# Altium PCB PCB1.PcbDoc
Units mil, origin at the board's own origin, x right, y up, seen from the top; angles counter-clockwise.
Board outline 2145 x 1440 mil, 2 copper layers (Top Layer, Bottom Layer); 28 components, 42 nets, 161 pads, 32 vias.
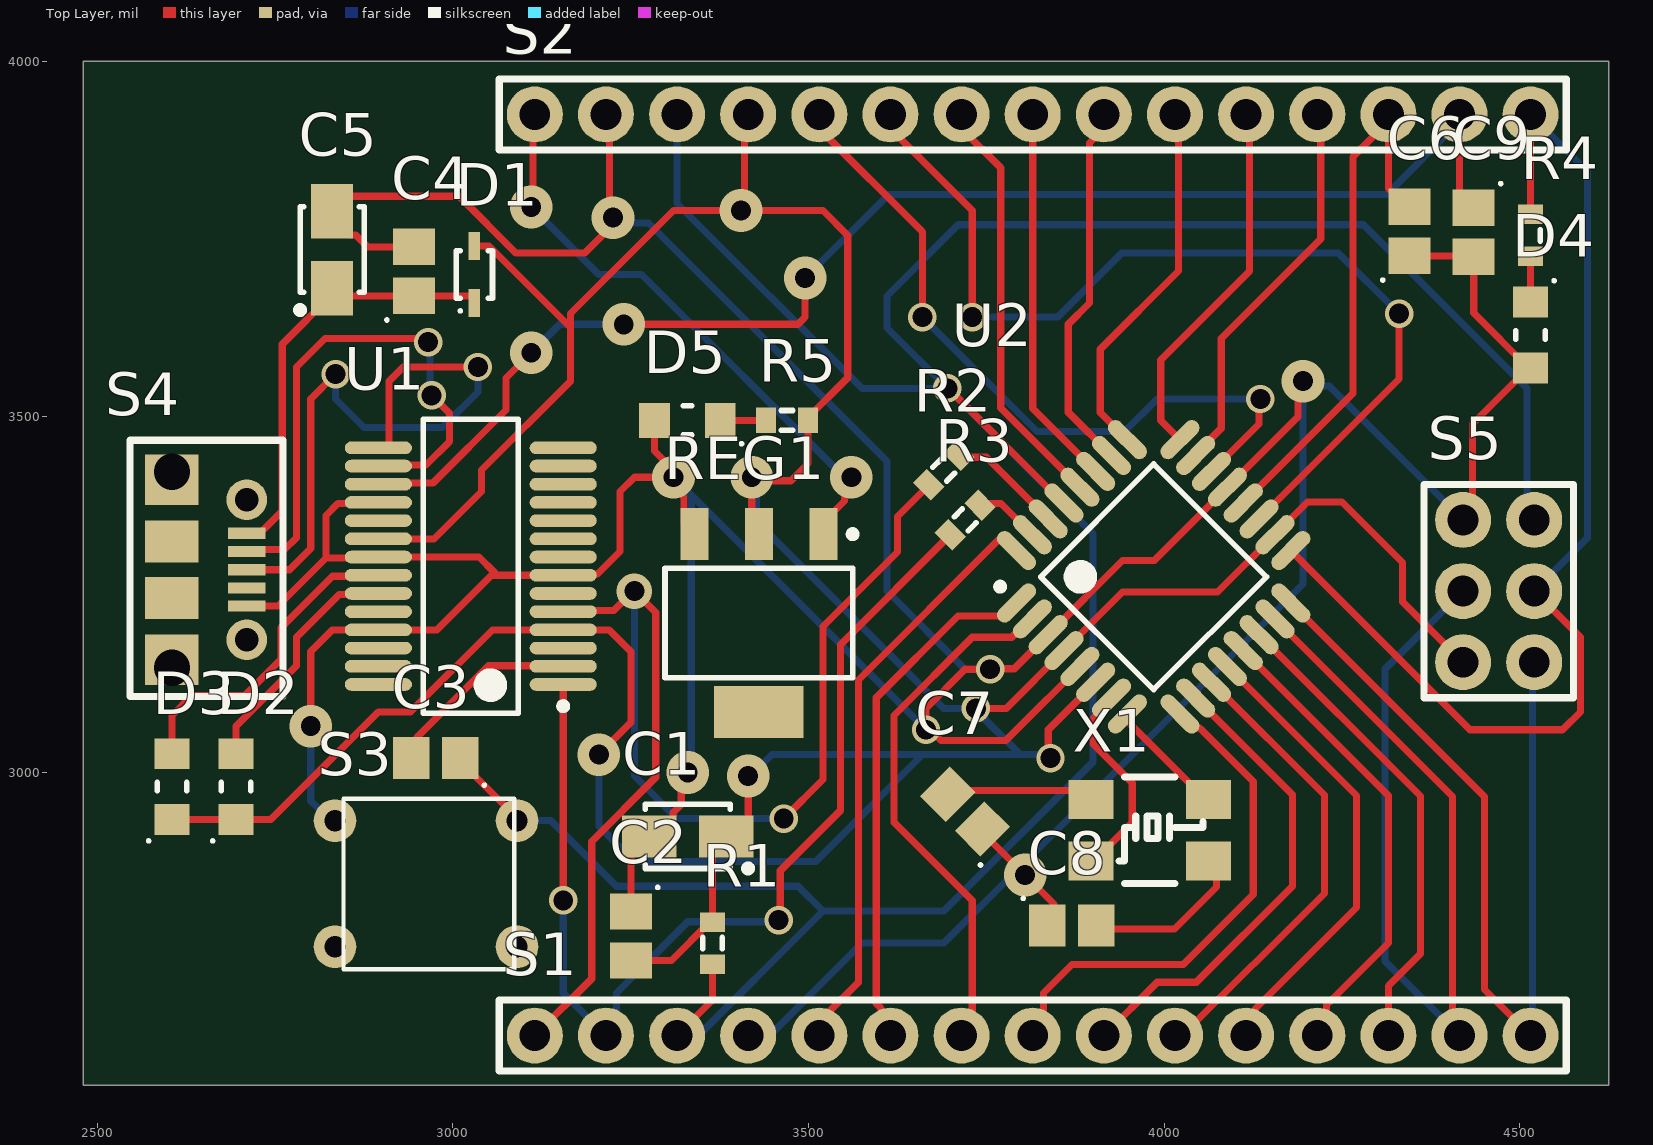
[diagram p0: Top Layer view]
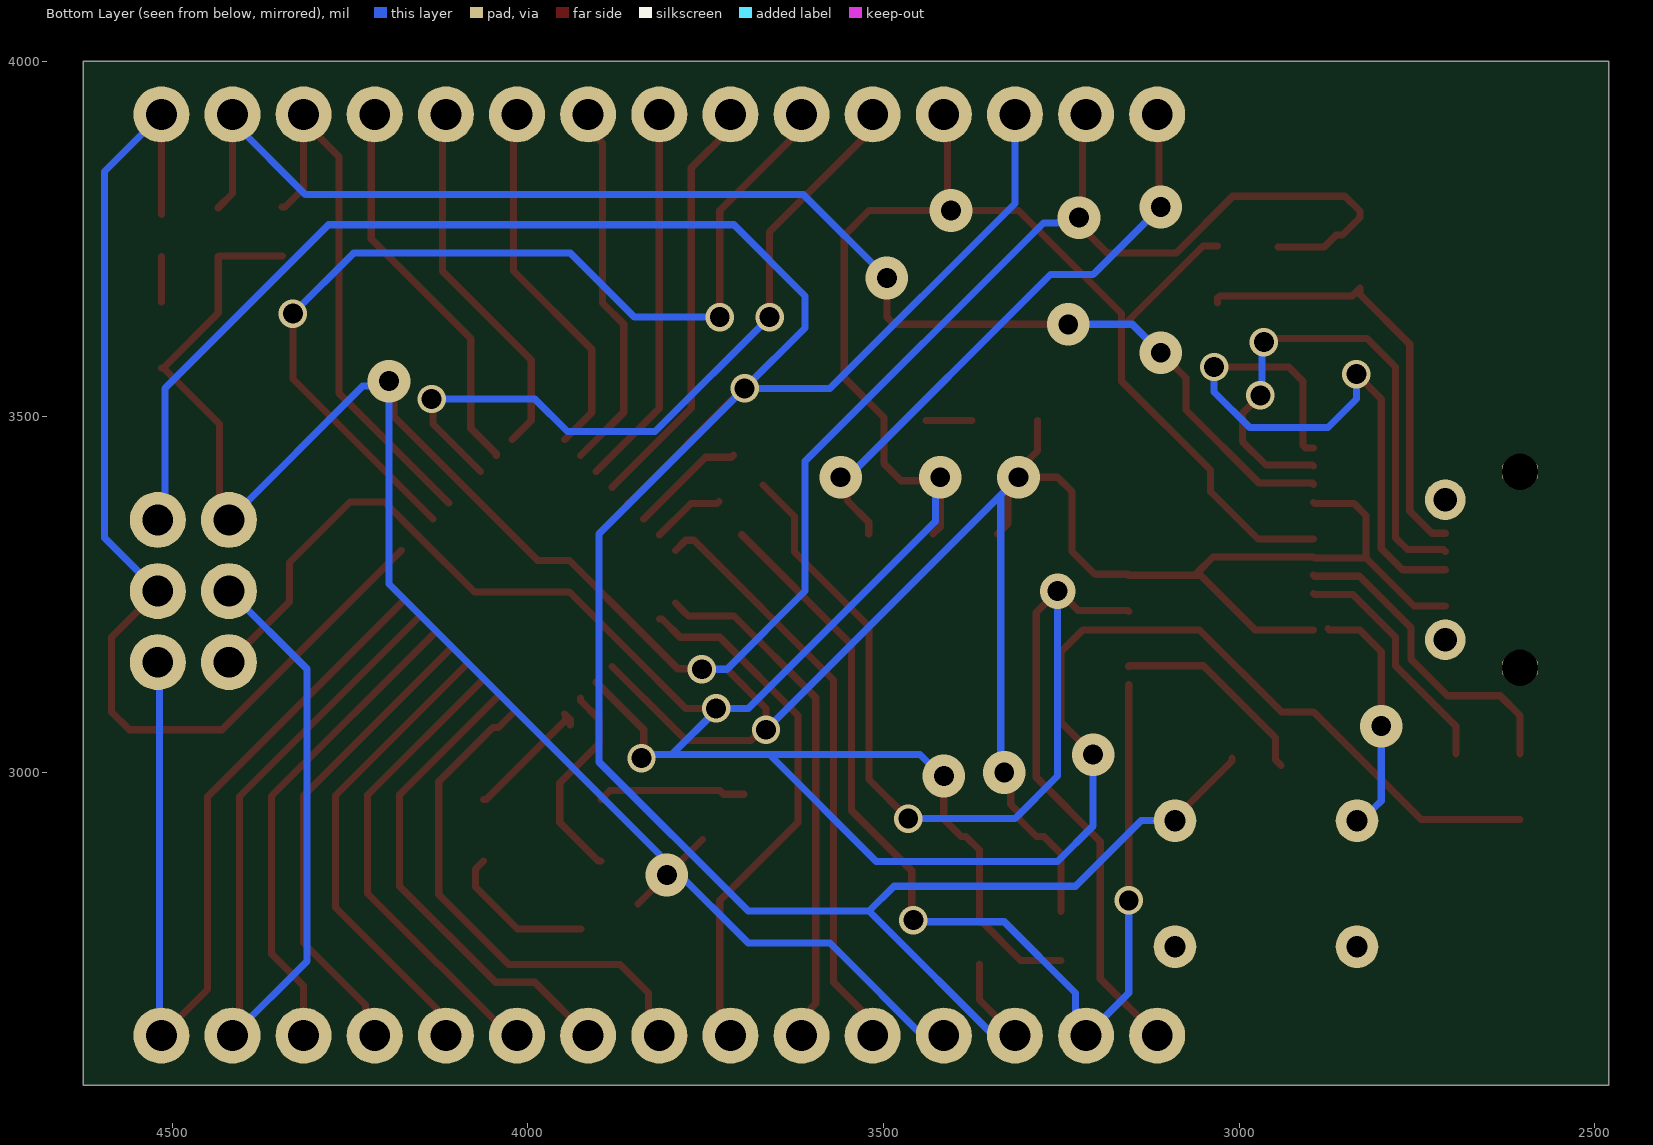
[diagram p1: Bottom Layer view, seen from below]

## Layer stack, top to bottom
Top Solder: solder mask 0.4, Solder Resist, Dk 3.5
Top Layer: signal copper 1.4
Dielectric 1: dielectric 12.6, FR-4, Dk 4.8
Bottom Layer: signal copper 1.4
Bottom Solder: solder mask 0.4, Solder Resist, Dk 3.5

## Board outline
2480,2560 2480,4000 4625,4000 4625,2560

## Design rules (kind name [scope] priority, off if disabled: settings)
Clearance [All] p1: gap=10 ignorepadtopadclearanceinfootprint=FALSE
PolygonConnect [All] p1: connectstyle=Relief reliefconductorwidth=10 reliefentries=4 polygonreliefangle="90 Angle" airgapwidth=10
RoutingVias [All] p1: holewidth=28 width=50 viastyle="Through Hole" minholewidth=28 minwidth=50 maxholewidth=28 maxwidth=50
SolderMaskExpansion [All] p1: expansion=4 istentingtop=FALSE
SupplyNets "Schematic Supply Nets_3" [InNet('+5')] p1: voltage=0.000
SupplyNets "Schematic Supply Nets_2" [InNet('GND')] p2: voltage=0.000
SupplyNets "Schematic Supply Nets_1" [InNet('3.3v')] p3: voltage=0.000
SupplyNets "Schematic Supply Nets" [InNet('VCC')] p4: voltage=0.000
Width [All] p1: maxlimit=10 minlimit=10 preferedwidth=10
30 further rules are at their usual default settings.

## Components (designator, comment, footprint, x,y, rotation, side; value= is the part's Value field where it differs from the comment)
C1 "Capacitor SMT Tantalum" "CASE A - 3216X18" 3330,2910 r180 top value=4.7µF
C2 "100nF Ceramic Multilayer Capacitor_1" CAPCP2012X09N 3250,2770 r270 top
C3 "100nF Ceramic Multilayer Capacitor_1" CAPCP2012X09N 2975.55,3020 r180 top
C4 "100nF Ceramic Multilayer Capacitor_1" CAPCP2012X09N 2945,3704.45 r90 top
C5 "Capacitor SMT Tantalum" "CASE A - 3216X18" 2830,3735 r90 top value=4.7µF
C6 "100nF Ceramic Multilayer Capacitor_1" CAPCP2012X09N 4345,3760.55 r90 top
C7 "C0805C180J5GACTU" CAPCP2012X09N 3720,2945 r135 top
C8 "C0805C180J5GACTU" CAPCP2012X09N 3870,2785 r0 top
C9 "100nF Ceramic Multilayer Capacitor_1" CAPCP2012X09N 4435,3759.45 r270 top
D1 "Schottky diode" DIOM1712X07N 3030,3700 r90 top
D2 "Red" LED1913X12NRED 2695,2980 r90 top
D3 "green" LED1913X12NGREEN 2605,2980 r90 top
D4 "blue" LED1913X12NBLUE 4515,3615 r270 top
D5 "blue" LED1913X12NBLUE 3329.53,3495 r180 top
R1 "Res3" J1-0603 3365,2760 r270 top value=1K
R2 "Res3" J1-0603 3690,3425 r225 top value=1K
R3 "Res3" J1-0603 3720,3355 r225 top value=1K
R4 "Res3" J1-0603 4515,3755 r90 top value=1K
R5 "Res3" J1-0603 3469.53,3495 r0 top value=1K
REG1 "Reg" SOT230P700X180-4N 3430,3210 r270 top
S1 "Left" Header 3115,2630 r0 top
S2 "Right" Header 3115,3925 r0 top
S3 "Switch" "Tactile Switch" 2834.09,2932.17 r180 top
S4 "Type B USB Connector" MicroUSB 2710,3333.43 r270 top
S5 "ICSP" "ISP HEADER" 3965,2460 r90 top
U1 "FT232RL, UART 3MBd, 28-Pin, SSOP" SOP65P780X200-28N 3025,3290 r180 top
U2 "ATMEGA328P-AU" TQFP80P900X900X120-32N 3985,3275 r45 top
X1 "Aker 16MHz Crystal SMT" "Aker S5C Crystal" 3896.89,2875.51 r180 top value=16MHz

## Footprints (in the part's own frame and the unit in brackets; to place one, negate y for a bottom-side part, rotate by r counter-clockwise, add the part's x,y. Pads: shape width x height; smd on the part's side, far side on the other; paste and mask are expansions set on the pad)
"Aker S5C Crystal" [mm]
  rect 1.6x1.4 smd: 1(0,0) 2(-4.2,0) 3(0,-2.2) 4(-4.2,-2.2)
  round 0.254 on Top Overlay: 5(-3,-2.4)
  silkscreen extent -4,-3 -1,0.8, body extent -4.7,-2.8 0.5,0.6, height 1
CAPCP2012X09N [mm] "Chip Capacitor, 2-Leads, Body 2.00x1.25mm, IPC Medium Density"
  rect 1.3x1.5 smd: 1(-0.875,0) 2(0.875,0)
  silkscreen extent -1.79,0.91 -1.69,1.01, body extent -1.05,-0.57 0.95,0.68, height 0.78
"CASE A - 3216X18" [mm] "Molded Capacitor, 2-Leads, Body 3.2x1.6mm, IPC Medium Density"
  rect 1.95x1.5 smd: 1(-1.375,0) 2(1.375,0)
  silkscreen extent -2.28,-1.14 1.52,1.27, body extent -1.52,-0.76 1.65,0.84, height 1.77
DIOM1712X07N [mm] "Molded Diode, 2-Leads, Body 1.70x1.25mm, IPC Medium Density"
  rect 1x0.4 smd: 1(-1.016,0) 2(1.016,0)
  silkscreen extent -1.35,-0.65 0.85,0.65, body extent -0.9,-0.45 0.9,0.45, height 0.8
Header [mm] "SIL Header"
  round 2 hole 1.1: 1(0,0) 2(2.54,0) 3(5.08,0) 4(7.62,0) 5(10.16,0) 6(12.7,0) 7(15.24,0) 8(17.78,0) 9(20.32,0) 10(22.86,0) 11(25.4,0) 12(27.94,0) 13(30.48,0) 14(33.02,0) 15(35.56,0)
  silkscreen extent -1.27,-1.27 36.83,1.27, body extent -1.33,-1.35 36.93,1.35, height 8.6
"ISP HEADER" [mm] "SIL Header for programming"
  round 2 hole 1.1: 1(17.653,-14.097) 2(17.653,-11.557) 3(20.193,-14.097) 4(20.193,-11.557) 5(22.733,-14.097) 6(22.733,-11.557)
  silkscreen extent 16.38,-15.49 24,-10.16, body extent 16.38,-15.37 24,-10.29, height 8
J1-0603 [mm] "Chip Resistor, Body 1.6x0.8mm, IPC High Density"
  rect 0.7x0.9 smd: 1(-0.75,0) 2(0.75,0)
  silkscreen extent -0.2,-0.35 0.2,0.35, body extent -0.85,-0.48 0.85,0.48, height 0.9
LED1913X12NBLUE [mm] "LED 2-Leads, Body 1.90x1.32mm, IPC Medium Density"
  rect 1.1x1.25 smd: 1(-1.175,0) 2(1.175,0)
  silkscreen extent -1.99,-0.53 0.15,0.89, body extent -1,-0.62 1.02,0.62, height 1.1
LED1913X12NGREEN [mm] "LED 2-Leads, Body 1.90x1.32mm, IPC Medium Density"
  rect 1.1x1.25 smd: 1(-1.175,0) 2(1.175,0)
  silkscreen extent -1.99,-0.53 0.15,0.89, body extent -1.01,-0.62 1.01,0.63, height 1.1
LED1913X12NRED [mm] "LED 2-Leads, Body 1.90x1.32mm, IPC Medium Density"
  rect 1.1x1.25 smd: 1(-1.175,0) 2(1.175,0)
  silkscreen extent -1.99,-0.53 0.15,0.89, body extent -1.02,-0.43 1.04,0.47, height 0.85
MicroUSB [mm] "MicroUSB  Molex 5Pin"
  rect 0.4x1.35 smd: 1(-0.07,0) 2(0.58,0) 3(1.23,0) 4(1.88,0) 5(2.53,0)
  rrect50% 0.6x1.3 hole 1.3: ""(-2.27,-2.667) ""(-2.27,-2.667) ""(4.73,-2.667)
  rect 1.8x1.9 smd: ""(-1.98,-2.678) ""(4.45,-2.678)
  round 1.45 hole 0.85: ""(-1.27,0) ""(3.73,0)
  rect 1.5x1.9 smd: ""(0.218,-2.678) ""(2.242,-2.678)
  silkscreen extent -3.39,-4.17 5.75,1.3, body extent -2.83,-5.32 5.37,0.11, height 2.68
SOP65P780X200-28N [mm] "SOP, 28-Leads, Body 10.20x5.30mm, Pitch 0.65mm, IPC Medium Density"
  oval 2.4x0.45 smd: 1(-3.3,4.225) 2(-3.3,3.575) 3(-3.3,2.925) 4(-3.3,2.275) 5(-3.3,1.625) 6(-3.3,0.975) 7(-3.3,0.325) 8(-3.3,-0.325) 9(-3.3,-0.975) 10(-3.3,-1.625) 11(-3.3,-2.275) 12(-3.3,-2.925) 13(-3.3,-3.575) 14(-3.3,-4.225) 15(3.3,-4.225) 16(3.3,-3.575) 17(3.3,-2.925) 18(3.3,-2.275) 19(3.3,-1.625) 20(3.3,-0.975) 21(3.3,-0.325) 22(3.3,0.325) 23(3.3,0.975) 24(3.3,1.625) 25(3.3,2.275) 26(3.3,2.925) 27(3.3,3.575) 28(3.3,4.225)
  silkscreen extent -3.43,-5.25 1.7,5.25, body extent -3.91,-5.1 3.91,5.1, height 2
SOT230P700X180-4N [mm] "SOT223, 4-Leads, Body 6.50x7.00mm (avg), Pitch 2.30mm, IPC Medium Density"
  rect 1.85x1 smd: 1(-3.175,2.3) 2(-3.175,0) 3(-3.175,-2.3)
  rect 1.85x3.2 smd: 4(3.175,0)
  silkscreen extent -3.3,-3.35 1.95,3.48, body extent -3.8,-3.12 3.29,3.38, height 1.65
"Tactile Switch" [mil]
  round 60 hole 30: 1(0,0) 2(-255.91,0) 3(0,177.17) 4(-255.91,177.17)
  silkscreen extent -252,-31 -12,209, body extent -277,-29 27,209, height 197
TQFP80P900X900X120-32N [mm] "TQFP, 32-Leads, Body 7.00x7.00mm, Pitch 0.80mm, IPC Medium Density"
  oval 1.75x0.55 smd: 1(-4.125,2.8) 2(-4.125,2) 3(-4.125,1.2) 4(-4.125,0.4) 5(-4.125,-0.4) 6(-4.125,-1.2) 7(-4.125,-2) 8(-4.125,-2.8) 17(4.125,-2.8) 18(4.125,-2) 19(4.125,-1.2) 20(4.125,-0.4) 21(4.125,0.4) 22(4.125,1.2) 23(4.125,2) 24(4.125,2.8)
  oval 0.55x1.75 smd: 9(-2.8,-4.125) 10(-2,-4.125) 11(-1.2,-4.125) 12(-0.4,-4.125) 13(0.4,-4.125) 14(1.2,-4.125) 15(2,-4.125) 16(2.8,-4.125) 25(2.8,4.125) 26(2,4.125) 27(1.2,4.125) 28(0.4,4.125) 29(-0.4,4.125) 30(-1.2,4.125) 31(-2,4.125) 32(-2.8,4.125)
  silkscreen extent -4.25,-2.85 2.85,3.75, body extent -4.44,-4.5 4.56,4.5, height 1.6

## Part data
C1 C5: library part "4.7µF Tant RS 496-3545", "Capacitor,tantalum,SMT,16V,4.7uF,10%,A-case", Package=3216-18, Tolerance=10%, Voltage=16V, ComponentLink1Description="Supplier Website", ComponentLink1URL=http://za.rs-online.com/web/search/searchBrowseAction.html?method=getProduct&R=4963545, ComponentLink2Description="RS Data sheet", ComponentLink2URL=http://docs-europe.origin.electrocomponents.com/webdocs/04ed/0900766b804ed4cc.pdf, LatestRevisionDate=28-April-2010, Part Originator="H Theron", Publisher=DPSS, RS Stock Nr.=496-3545
C2 C3 C4 C6 C9: "AVX 0805 Standard 100nF Ceramic Multilayer Capacitor, 50 V dc X7R Dielectric ±10% SMD", Capacitance=100nF, Manufacturer=AVX, Package=0805, Voltage=50V, Creator="Ritesh Kanjee", Datasheet URL=http://za.rs-online.com/web/p/ceramic-multilayer-capacitors/4646688/, Date Created="18 February 2015", RS Stock No.=464-6688
C7 C8: library part "18pF Ceramic Multilayer Capacitor, 50 V dc C0G Dielectric ±5% SMD", "18pF Ceramic Multilayer Capacitor, 50 V dc C0G Dielectric ±5% SMD", Capacitance=18pF, Manufacturer=Kemet, Package=0805, Voltage=50V, Creator="Ritesh Kanjee", Datasheet URL=http://za.rs-online.com/web/p/ceramic-multilayer-capacitors/6480935/?searchTerm=C0805C180J5GACTU&relevancy-data=636F3D3226696E3D4931384E4B6E6F776E41734D504E266C753D656E266D6D3D6D61746368616C6C7061727469616C26706D3D5E5B5C707B4C7D5C707B4E647D2D2C2F255C2E5D2B2426706F3D313326736E3D592673743D4D414E5F504152545F4E554D4245522677633D424F5448267573743D4330383035433138304A35474143545526, Date Created="18 February 2015", RS Stock No.=648-0935
D1: library part "Schottky Diode, 0.5A, 20V, 2.4ns, 2-Pin SMini2 F5 B", "Panasonic DB2J20900L Schottky Diode, 0.5A, 20V, 2.4ns, 2-Pin SMini2 F5 B", Manufacturer=Panasonic, Manufacturer Part No.=DB2J20900L, Maximum Continuous Forward Current=0.5A, Peak Reverse Repetitive Voltage=20V, Created By="R Kanjee", Datasheet=http://docs-europe.electrocomponents.com/webdocs/1398/0900766b813986b3.pdf, Date Created="1 March 2015", RS Stock No.=713-2703
D2: library part "Kingbright Red LED, 100 mcd 120 ° 0805", "Kingbright Red LED, 100 mcd 120 ° 0805", Color=RED, Forward Voltage=1.85V, Manufacturer=KingBright, Manufacturer Part No.=KP-2012SRC-PRV, Creator="Ritesh Kanjee", Datasheet URL=http://za.rs-online.com/web/p/visible-leds/4663813/, Date Created="18 February 2015", RS Stock No.=466-3813
D3: library part "Kingbright Green LED, 70 mcd 120 ° 0805", "Kingbright Green LED, 70 mcd 120 ° 0805", Color=Green, Forward Voltage="2.1 V", Manufacturer=KingBright, Manufacturer Part No.=KP-2012MGC, Creator="Ritesh Kanjee", Datasheet URL=http://za.rs-online.com/web/p/visible-leds/4663778/, Date Created="18 February 2015", RS Stock No.=466-3778
D4 D5: library part "Kingbright Blue LED, 60 mcd 120 ° 0805", "Kingbright Blue LED, 60 mcd 120 ° 0805", Color=Blue, Forward Voltage=3.2V, Manufacturer=KingBright, Manufacturer Part No.=KP-2012PBC-A, Creator="Ritesh Kanjee", Datasheet URL=http://za.rs-online.com/web/p/visible-leds/4663784/, Date Created="18 February 2015", RS Stock No.=466-3784
R1 R2 R3 R4 R5: "Resistor", LatestRevisionDate=29-May-2009, LatestRevisionNote="IPC-7351 Footprint Added.", PackageDescription="Chip Resistor", PackageReference=J1-0603, Published=8-Jun-2000, Publisher="Altium Limited"
REG1: library part LM1117MP-5.0, "LM1117MP-5.0/NOPB, Low Dropout Voltage Regulator, 1.5A, 5 V ±1%, 4-Pin SOT-223", Manufacturer="Texas Instruments", Maximum Input Voltage=15V, Output Voltage=5V, Supply Current=1.5Amps, Created By="R Kanjee", Datasheet URL=http://za.rs-online.com/web/p/low-dropout-voltage-regulators/5339583/, Date Created="26 February 2015", RS Stock No.=533-9583
S1 S2: library part "Single row; PCB headers", "connector;str header;single row;.1 cont centers;.095 tail;gold or gtx;36 contact", Current Rating="3Amps Continuous", Manufacturer=FCI, Manufacturer Part No.=68000-236HLF, Created By="R Kanjee", Date Created="1 March 2015", RS Stock No.=2509565626
S3: library part "Tactile Switch SPST- NO 0.05A @24V", "Tactile Switch SPST- NO 0.05A @24V", Manufacturer=Omron, Manufacturer Part No.=B3F1000, Creator="R Kanjee", Date Created="25 February 2015", RS Stock No.=686-6847, State="Normaly Open"
S4: library part "Micro USB Connector, 30 V ac, 1.8A", "NewMolex Right Angle SMT Female Type B Micro USB Connector, 30 V ac, 1.8A", Manufacturer=Molex, Manufacturer Part No.=105017-0001, Max Current=1.8A, Max Voltage=30V, Creator="R Kanjee", Datasheet URL=http://za.rs-online.com/web/p/micro-usb-connectors/8486764/, Date Created="28 February 2015", RS Stock No=848-6764
S5: library part "Programming ISP, Programming Headers Dual Row", "Programming Headers Dual Row", Current Rating="3Amps Continuous", Manufacturer=FCI, Manufacturer Part No.=68000-236HLF, Created By="R Kanjee", Date Created="1 March 2015", RS Stock No.=2509565626
U1: library part "FT232RL USB to UART, Universal Asynchronous Receiver & Transmitter 3MBd, 28-Pin, SSOP", "FT232RL, Universal Asynchronous Receiver & Transmitter 3MBd, 28-Pin, SSOP", Manufacturer="FTDI Chip", Manufacturer Part No.=FT232RL, Creator="R Kanjee", Date Created="03 March 2015", Pin Count=28, RS Stock No.=406-580
U2: "ATMEGA328P-AU, 8 bit AVR Microcontroller 20MHz 1 kB, 32 kB Flash, 2 kB RAM, I2C 32-Pin TQFP", Company="Lumina Inova", Created By="Ritesh Kanjee", Datasheet URL=http://docs-europe.electrocomponents.com/webdocs/0db4/0900766b80db4deb.pdf, Date Created="14 February 2015", RS Stock No.=696-3092
X1: library part "Aker  C5S-16.000-12-3030-X", "Aker S5C SMT Crystal", Frequency Stability=+/-30ppm, Load Capacitance=12pF, Manufacturer=Aker, Manufacturer Part #=C5S-16.000-12-3030-X, Package="3.2x5mm SMD", Creator="R Kanjee", HelpURL=http://za.rs-online.com/web/p/crystal-units/6719488/, RS="RS 671-9488", RS Stock Nr.=671-9488, Supplier=RS

## Via types
v1: diameter 40, hole 28, Top Layer to Bottom Layer, 16 vias
v2: diameter 60, hole 28, Top Layer to Bottom Layer, 15 vias
v3: diameter 50, hole 28, Top Layer to Bottom Layer, 1 vias

## Nets (pads, with @x,y where several pads share a name; then routed paths per layer and width w, separated by ;. In a path a pad name is that pad's centre, name@x,y a point inside that pad or via, vN(x,y) a via of type N, cw(c..) or ccw(c..) an arc to the next point about the centre after c; other vN are vias at no path point)
3.3v: C9.1 S2.14 U1.17 | length 1929.1
  Top Layer w10: U1.17 2896.56,3406.63 2971.63,3406.63 3074.49,3509.49 3074.49,3554.49 v2(3110,3590) ; v2(3240,3630) 3485,3630 3495,3640 v2(3495,3695) ; S2.14 4415,3813.9 C9.1
  Bottom Layer w10: v2(3110,3590) 3150,3630 v2(3240,3630) ; v2(3495,3695) 3612.21,3812.21 4312.21,3812.21 S2.14@4415,3915
+5: C1.1 C2.2 D1.2 D2.1 D3.1 R1.1 R5.2 REG1.2 S2.4 S5.2 U1.4 U1.20 U2.4 U2.6 U2.18 | length 5795.1
  Top Layer w10: D3.1 D2.1 2743.74,2933.74 2895,3085 2940,3085 3055.43,3200.43 U1.4 3219.57,3200.43 3250,3170 3250,3070 v2(3205,3025) ; U1.20 2973.39,3328.39 3040,3395 3040,3425 3165,3550 3165,3625.49 ; D1.2 3050.49,3740 3165,3625.49 ; C2.2 3307.09,2735.55 3361.06,2789.53 R1.1 3365,2890.87 C1.1 3390.47,2910 3415,2934.53 v2(3415,2995) ; S2.4 3410,3920 3410,3795 v2(3405,3790) ; REG1.2 3420,3345 v2(3420,3415) 3425,3410 3475,3410 3499.06,3434.06 R5.2 3499.06,3498.94 3555,3554.88 3555,3755 3520,3790 v2(3405,3790) ; v1(3735,3090) 3777.73,3090 U2.4 3941.25,3253.52 4074.87,3253.52 U2.18 4201.36,3380 4250,3380 4335,3295 4335,3240 S5.2 ; v1(3840,3020) 3836.81,3023.19 3836.81,3060 U2.6 ; 3165,3625.49 3165,3645 3310,3790 v2(3405,3790)
  Bottom Layer w10: v2(3205,3025) 3205,2925 3255,2875 3510,2875 3660,3025 ; v2(3415,2995) 3418.64,2995 3448.64,3025 3660,3025 ; v2(3420,3415) 3426.82,3408.18 3426.82,3353.18 3690,3090 v1(3735,3090) 3735,3087.5 3797.5,3025 ; v1(3840,3020) 3835,3025 3797.5,3025 ; 3660,3025 3797.5,3025
A0: S2.12 U2.23 | length 552.3
  Top Layer w10: U2.23 4044.16,3448.06 4080,3483.9 4080,3610 4220,3750 S2.12@4220,3925
A1: S2.11 U2.24 | length 520.1
  Top Layer w10: U2.24 3995,3494.67 3995,3580 4120,3705 S2.11@4120,3925
A2: S2.10 U2.25 | length 518.6
  Top Layer w10: U2.25 3910,3505.9 3910,3595 4020,3705 S2.10@4020,3925
A3: S2.9 U2.26 | length 527.5
  Top Layer w10: S2.9@3920,3925 3920,3909.77 3895,3884.77 3895,3660 3865,3630 3865,3506.36 U2.26
A4: S2.8 U2.27 | length 521
  Top Layer w10: S2.8@3815,3907.53 3815,3511.81 U2.27
A5: S2.7 U2.28 | length 572.9
  Top Layer w10: S2.7@3715,3905 3770,3850 3770,3512.27 U2.28
A6: S2.6 U2.19 | length 1355.2
  Top Layer w10: S2.6@3615,3905 3730,3790 v1(3730,3640) ; U2.19 4330,3553.19 v1(4330,3645)
  Bottom Layer w10: v1(3730,3640) 3850,3640 3940,3730 4245,3730 v1(4330,3645)
A7: S2.5 U2.22 | length 1015.8
  Top Layer w10: S2.5@3515,3905 3660,3760 v1(3660,3640) ; U2.22 4133.19,3490 4133.19,3523.19 v1(4135,3525)
  Bottom Layer w10: v1(3660,3640) 3820.8,3479.2 3944.2,3479.2 3990,3525 v1(4135,3525)
AREF: C6.2 S2.13 U2.20 | length 776.2
  Top Layer w10: U2.20 4265,3532.73 4265,3865 S2.13@4322.5,3922.5 ; S2.13 4315,3821.06 4341.06,3795 C6.2
D2: S1.5 U2.32 | length 841.1
  Top Layer w10: S1.5@3530,2615 3530,2665 3570,2705 3570,3130 3766.36,3326.36 3777.74,3326.36 U2.32
D3: S1.6 U2.1 | length 735.6
  Top Layer w10: S1.6 3601.85,2643.15 3601.85,2668.38 3595,2675.23 3595,3105 3710,3220 3774.1,3220 3780.54,3226.44 U2.1
D4: S1.7 U2.2 | length 761.3
  Top Layer w10: S1.7@3730,2615 3730,2820 3620,2930 3620,3080 3730,3190 3785.49,3190 3811.33,3215.84 U2.2
D5: S1.8 U2.9 | length 719.9
  Top Layer w10: S1.8 3830,2645 3830,2690 3870,2730 4026.72,2730 4125,2828.28 4125,2987.24 4050.92,3061.32 4048.95,3063.28 4040.82,3063.28 U2.9
D6: S1.9 U2.10 | length 672.7
  Top Layer w10: S1.9 3990,2705 4045,2705 4180,2840 4180,2968.64 U2.10
D7: S1.10 U2.11 | length 655.3
  Top Layer w10: S1.10 4025,2630 4225,2830 4225,2968.19 U2.11
D8: S1.11 U2.12 | length 658.3
  Top Layer w10: U2.12 4270,2967.73 4270,2810 4128.15,2668.15 4128.15,2643.15 S1.11
D9: S1.12 U2.13 | length 667.2
  Top Layer w10: U2.13 4315,2967.27 4315,2760 4228.15,2673.15 4228.15,2643.15 S1.12
D10: S1.13 U2.14 | length 676.1
  Top Layer w10: U2.14 4360,2966.81 4360,2745 4315,2700 S1.13
D11: S1.14 S5.4 U2.15 | length 1393.2
  Top Layer w10: U2.15 4405,2966.36 S1.14@4405,2640
  Bottom Layer w10: S1.14 4310,2735 4310,3145 S5.4
D12: S1.15 S5.1 U2.16 | length 1296.1
  Top Layer w10: U2.16 4450,2965.9 4450,2695 S1.15@4530,2615
  Bottom Layer w10: S1.15 4517.5,2632.5 4517.5,3152.5 S5.1
D13: R4.2 S2.15 S5.3 U2.17 | length 1593.5
  Top Layer w10: U2.17 4429.67,3060 4560,3060 4585,3085 4585,3190 S5.3 ; R4.2 S2.15
  Bottom Layer w10: S2.15 4595,3845 4595,3330 S5.3
GND: C1.2 C2.1 C4.2 C5.2 C6.1 C7.1 C8.1 C9.2 D4.2 D5.2 REG1.3 S1.4 S2.2 S3.1 S4.5 S5.6 U1.7 U1.18 U1.21 U1.25 U2.3 U2.5 U2.21 | length 7704.1
  Top Layer w10: S4.5 2753.82,3233.82 2821.32,3301.32 ; v2(2800,3065) 2800,3170 2830,3200 2872.83,3200 U1.25@2875,3202.17 ; C5.2@2830,3788.45 2830,3780.28 2854.53,3755.75 2863.39,3755.75 2880.24,3738.9 C4.2 ; C5.2 2850.87,3810 3008.77,3810 3088.77,3730 3185,3730 3225,3770 v2(3225,3780) 3220,3785 3220,3920 S2.2 ; U1.25 2977.15,3200.43 3053.92,3277.2 ; U1.18 2893.6,3378.09 2838.09,3378.09 2821.32,3361.32 2821.32,3301.32 ; C2.1 3250,2885.47 3274.53,2910 C1.2 3284.72,2910 3309.25,2934.53 3309.25,2943.39 3320.87,2955 3320.87,2990.87 v2(3330,3000) ; D5.2 3283.27,3451.91 3310,3425.17 v2(3310,3415) ; REG1.3 3324.76,3349.69 3324.76,3386.71 3310,3401.47 v2(3310,3415) ; C7.1@3754.36,2905.64 v2(3804.32,2855.68) 3845,2815 ; U2.5 3792.27,3060 3777.39,3045.12 3749.32,3045.12 3749.2,3045 3685.86,3045 3670.86,3060 v1(3665,3060) 3665,3090 3720,3145 v1(3755,3145) 3755.81,3145.81 3789,3145.81 U2.3 3941.25,3298.06 3985.79,3298.06 U2.21 4187.73,3500 4187.73,3542.73 v2(4195,3550) ; C6.1 4433.9,3726.1 C9.2 4435,3645.79 D4.2@4512.05,3568.74 ; S5.6 4433.15,3368.15 4433.15,3489.85 D4.2@4512.05,3568.74 ; D4.2 D4.2@4512.05,3568.74 ; 2821.32,3301.32 2893.6,3301.32 U1.21 3036.61,3302.8 3058.06,3281.35 3053.92,3277.2 ; 3053.92,3277.2 U1.7 3156.4,3278.68 3200.24,3278.68 3200.5,3278.94 3203.19,3278.94 3235,3310.75 3235,3395 3255,3415 v2(3310,3415)
  Bottom Layer w10: v2(2800,3065) 2800,2960 2810,2950 ; v2(3225,3780) 3232.5,3772.5 3275,3772.5 3610,3437.5 3610,3255 3720,3145 v1(3755,3145) ; v2(3310,3415) 3335,3390 ; v2(3330,3000) 3335,3005 3335,3390 ; S1.4@3430,2615 3575,2760 3690,2760 v2@3795,2865 ; v1(3665,3060) 3335,3390 ; v2(3804.32,2855.68) v2@3795,2865 ; S5.6 4231.82,3543.18 4201.82,3543.18 v2(4195,3550) 4195,3265 3964.22,3034.22 v2@3795,2865
NetC3_2: C3.2 U1.2 | length 290.3
  Top Layer w10: C3.2@2941.1,3010 2948.67,3017.57 2948.67,3048.67 3050,3150 3154.17,3150 U1.2
NetC7_2: C7.2 X1.3 | length 208.6
  Top Layer w10: C7.2 3724.76,2969.36 3730.02,2974.62 3884.4,2974.62 X1.3
NetC8_2: C8.2 X1.2 | length 213.9
  Top Layer w10: C8.2@3925,2780 4014.48,2780 4073.29,2838.81 4073.29,2864.46 X1.2
NetD2_2: D2.2 U1.23 | length 339.5
  Top Layer w10: D2.2 2695,3065 2780,3150 2780,3190 2840.14,3250.14 2893.6,3250.14 U1.23
NetD3_2: D3.2 U1.22 | length 451.4
  Top Layer w10: D3.2 2605,3080 2632.8,3107.8 2706.94,3107.8 2758.32,3159.18 2758.32,3203.32 2830.73,3275.73 2893.6,3275.73 U1.22
NetD4_1: D4.1 R4.1 | length 64.2
  Top Layer w10: D4.1 R4.1
NetD5_1: D5.1 R5.1 | length 64.2
  Top Layer w10: D5.1 R5.1
NetR2_1: R2.1 U2.30 | length 162.9
  Top Layer w10: R2.1 3713.66,3443.1 3750.09,3443.1 U2.30
NetR3_1: R3.1 U2.31 | length 103
  Top Layer w10: R3.1@3730.88,3380.88 3733.66,3378.1 3770.55,3378.1 U2.31
NetS4_2: S4.2 U1.16 | length 788.2
  Top Layer w10: S4.2 2712.72,3313.31 2763.31,3313.31 2780,3330 2780,3570 2820,3610 2960,3610 v1(2965,3605) ; U1.16 2896.56,3432.22 2962.22,3432.22 2995,3465 2995,3505 v1(2970,3530)
  Bottom Layer w10: v1(2965,3605) 2967.5,3602.5 2967.5,3532.5 v1(2970,3530)
NetS4_3: S4.3 U1.15 | length 909
  Top Layer w10: S4.3 2770,3285 2800,3315 2800,3525 v1(2835,3560) ; U1.15 2906.44,3456.34 2910,3459.9 2910,3550 2930,3570 v1(3035,3570)
  Bottom Layer w10: v1(2835,3560) 2835,3525 2875,3485 2985,3485 3035,3535 v1(3035,3570)
NetU2_7: U2.7 X1.1 | length 288.8
  Top Layer w10: X1.1 3900.83,2875.51 3955,2929.68 3955,2985 3900,3040 3900,3075.49 3925.84,3101.33 U2.7
NetU2_8: U2.8 X1.4 | length 189.5
  Top Layer w10: U2.8@3940.16,3066.65 3940.16,3074.26 U2.8 3946.97,3081.07 3946.97,3073.46 4058.31,2962.13 X1.4
Reset: C3.1 R1.2 S1.3 S2.3 S3.2 S5.5 U2.29 | length 4285
  Top Layer w10: C3.1 3010,3016.06 3090,2936.06 S3.2 ; S1.3 3365,2680 R1.2 ; v1(3695,3540) 3696.36,3540 3857.66,3378.7 U2.29
  Bottom Layer w10: S3.2 3137.83,2932.17 3230,2840 3485,2840 3520,2805 ; S2.3@3315,3905 3315,3800 3575,3540 v1(3695,3540) ; S1.3@3330,2615 3520,2805 ; S5.5 4510,3365 4510,3540 4280,3770 3710,3770 3610,3670 3610,3625 v1(3695,3540) ; 3520,2805 3690,2805 3900,3015 3900,3335 v1(3695,3540)
RX: R2.2 S1.1 U1.5 | length 1868.4
  Top Layer w10: S1.1 3195,2710 3195,2903.11 3285,2993.11 3285,3225 v3(3255,3255) 3253.43,3255 3225.93,3227.5 3156.4,3227.5 U1.5 ; v1(3465,2935) 3520,2990 3520,3205 3625,3310 3625,3360 R2.2
  Bottom Layer w10: v3(3255,3255) 3255,2995 3315,2935 v1(3465,2935)
TX: R3.2 S1.2 U1.1 | length 1526.7
  Top Layer w10: U1.1 3154.92,3070.93 3155,3070.85 v1(3155,2820) ; v1(3457.75,2792.25) 3460,2794.5 3460,2861.74 3545,2946.74 3545,3180 R3.2
  Bottom Layer w10: v1(3155,2820) 3155,2690 3230,2615 3230,2690 3330,2790 3455.5,2790 v1(3457.75,2792.25)
VCC: REG1.1 S2.1 | length 835.8
  Top Layer w10: v2(3110,3795) 3112.5,3797.5 3112.5,3922.5 S2.1 ; REG1.1 3520.55,3351.73 3550.43,3381.61 3550.43,3405.43 v2(3560,3415)
  Bottom Layer w10: v2(3110,3795) 3205,3700 3265,3700 3550,3415 v2(3560,3415)
VUSB: C4.1 C5.1 D1.1 S4.1 | length 618.2
  Top Layer w10: S4.1 2728.7,3336.18 2760,3367.48 2760,3602.01 2830,3672.01 C5.1 2840.87,3670 C4.1 3027.13,3670 3030,3667.13 D1.1
pads on no net: REG1.4 S3.3 S3.4 S4. S4.4 U1.3 U1.6 U1.8 U1.9 U1.10 U1.11 U1.12 U1.13 U1.14 U1.19 U1.24 U1.26 U1.27 U1.28 X1.5

## Silkscreen, mask and mechanical layers (free items; w line width, h text height)
Mechanical 1:
  lines w10: 1595,1560 5675,1560 5675,4795 1595,4795 1595,1560 ; 2480,2560 4625,2560 4625,4000 2480,4000 2480,2560